# Altium PCB VIGIA_2_1.PcbDoc
Units mm, origin at the board's own origin, x right, y up, seen from the top; angles counter-clockwise.
Board outline 27 x 40 mm, 2 copper layers (Top Layer, Bottom Layer); 26 components, 24 nets, 76 pads, 8 vias.
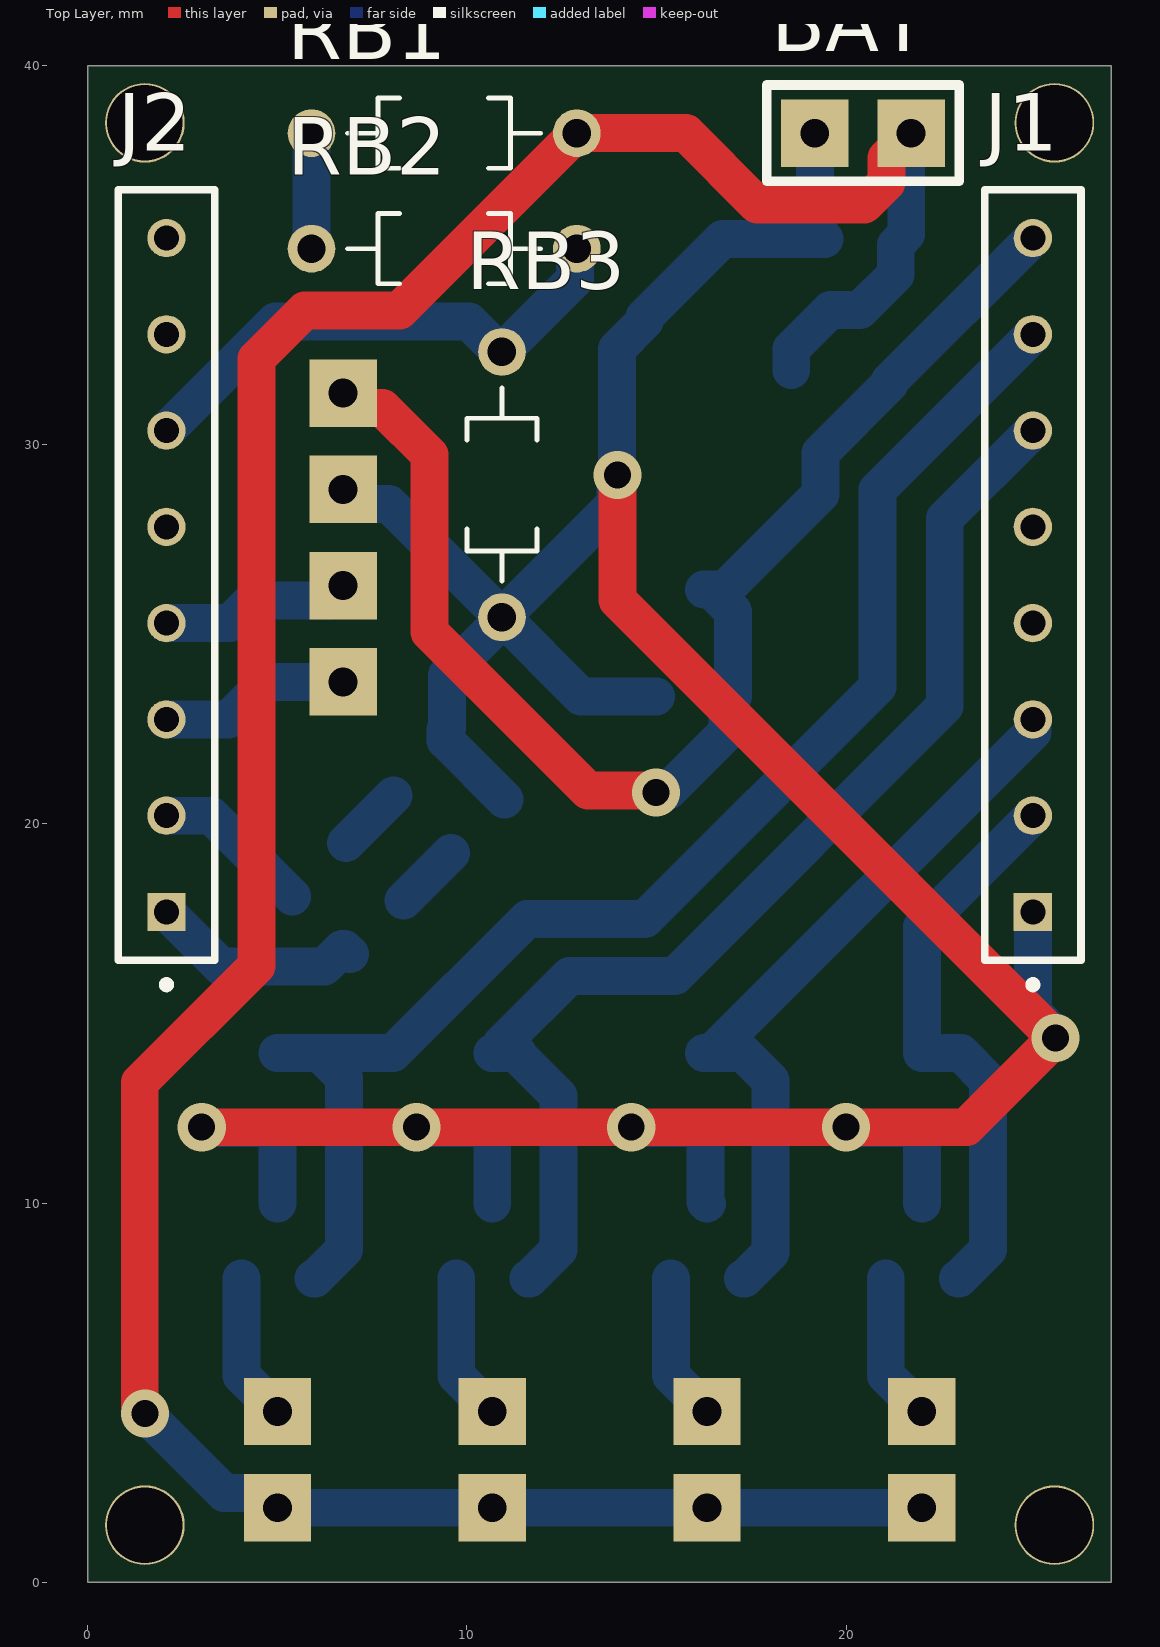
[diagram p0: Top Layer view]
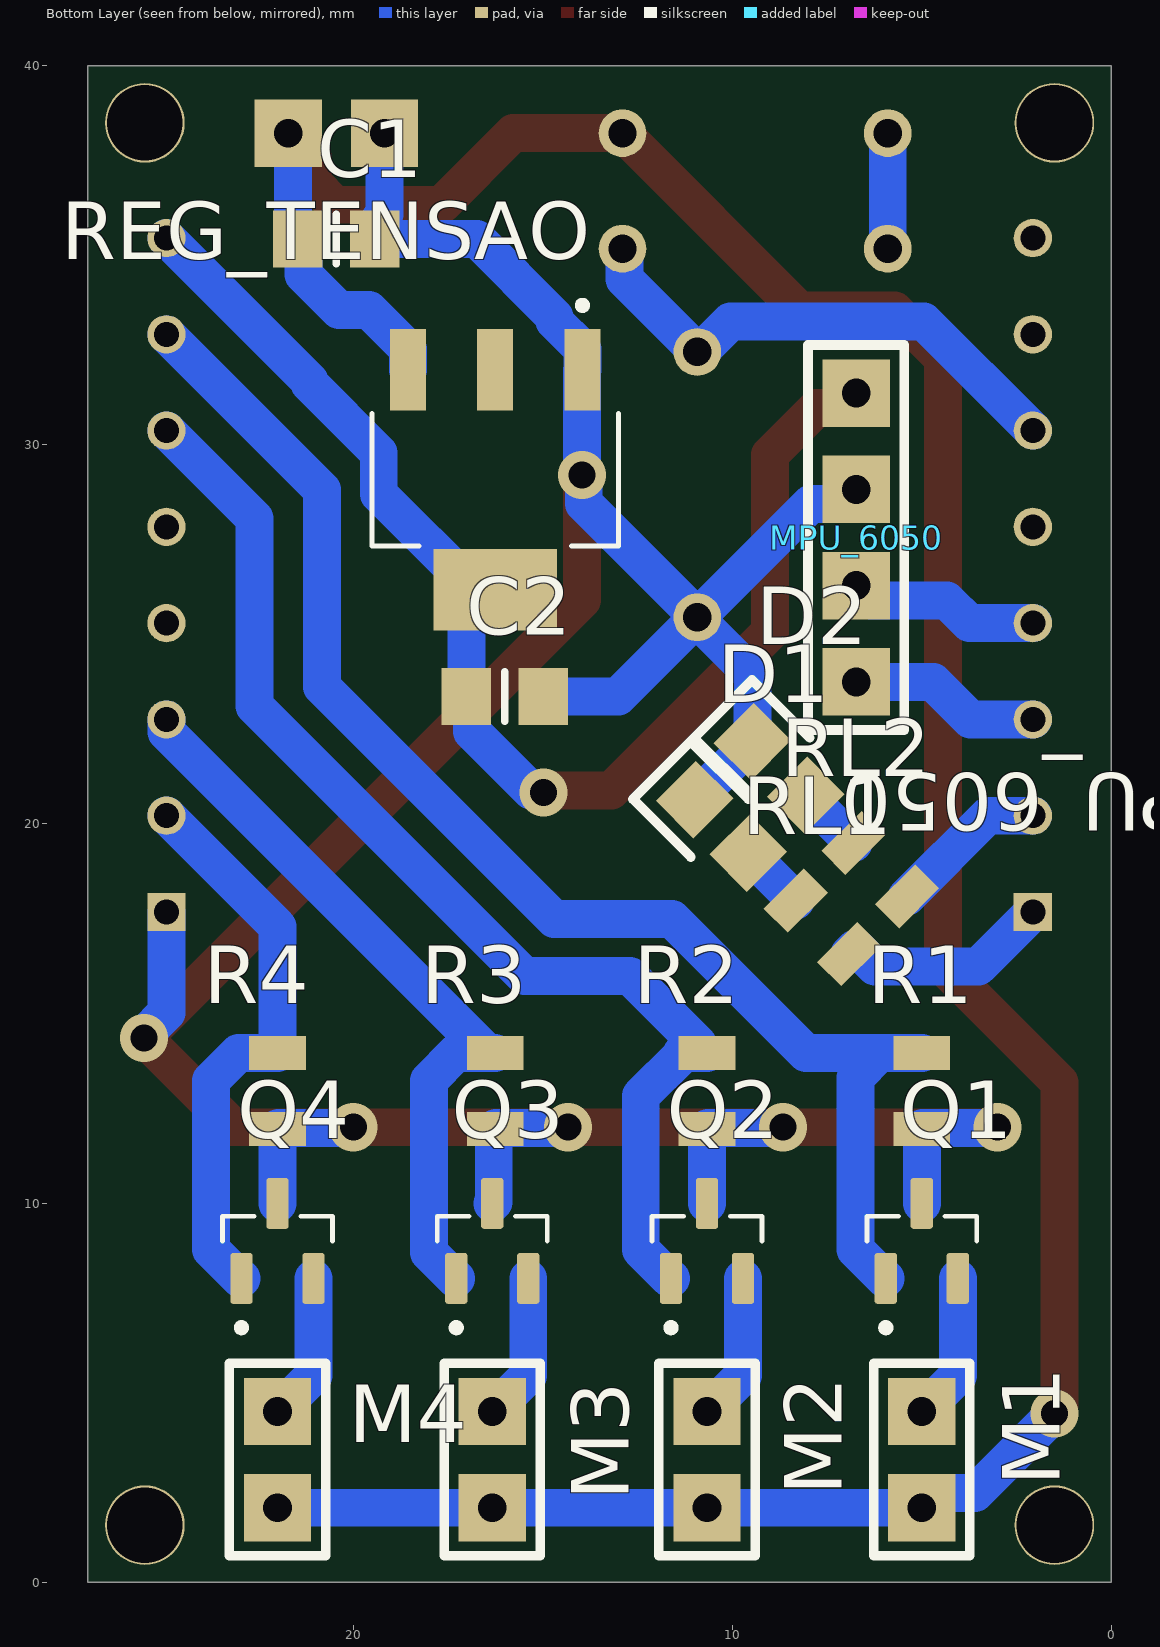
[diagram p1: Bottom Layer view, seen from below]

## Layer stack, top to bottom
Top Solder: solder mask 0.0102, Solder Resist, Dk 3.5
Top Layer: signal copper 0.0356
Dielectric 1: dielectric 0.32, FR-4, Dk 4.8
Bottom Layer: signal copper 0.0356
Bottom Solder: solder mask 0.0102, Solder Resist, Dk 3.5

## Board outline
0,0 0,40 27,40 27,0

## Design rules (kind name [scope] priority, off if disabled: settings)
Clearance [All] p1: gap=0.5 ignorepadtopadclearanceinfootprint=FALSE
PolygonConnect [All] p1: connectstyle=Relief reliefconductorwidth=0.254 reliefentries=4 polygonreliefangle="90 Angle" airgapwidth=0.254
RoutingVias [All] p1: holewidth=0.711 width=1.27 viastyle="Through Hole" minholewidth=0.711 minwidth=1.27 maxholewidth=0.711 maxwidth=1.27
SolderMaskExpansion [All] p1: expansion=0.102 istentingtop=FALSE
SupplyNets "Schematic Supply Nets" [InNet('GND')] p1: voltage=0.000
Width [All] p1: maxlimit=1 minlimit=1 preferedwidth=1 minimp=50.000000 maximp=50.000000 favimp=50.000000
30 further rules are at their usual default settings.

## Components (designator, comment, footprint, x,y, rotation, side; value= is the part's Value field where it differs from the comment)
BAT "CONECTOR_2PIN" CON2 21.717,38.227 r180 top
C1 "CAP" "CAP 0805" 20.447,35.433 r0 bottom
C2 "CAP" "CAP 0805" 16.002,23.368 r0 bottom
D1 "DBGLED1" "LED 0805" 10.287,19.939 r45 bottom
D2 "DBGLED2" "LED 0805" 8.763,21.463 r45 bottom
J1 "GESP1" SAMTEC_SS-108-T-2 24.93,17.68 r270 top
J2 "GESP2" SAMTEC_SS-108-T-2 2.07,17.68 r270 top
M1 "CONECTOR_2PIN" CON2 5,4.5 r270 bottom
M2 "CONECTOR_2PIN" CON2 10.667,4.5 r270 bottom
M3 "CONECTOR_2PIN" CON2 16.333,4.5 r270 bottom
M4 "CONECTOR_2PIN" CON2 22,4.5 r270 bottom
MPU_6050 "CONECTOR_4PIN" CON4 6.731,31.369 r270 bottom
Q1 "BSS84_RFG" SOT95P240X115-3N 5,9 r90 bottom
Q2 "BSS84_RFG" SOT95P240X115-3N 10.667,9 r90 bottom
Q3 "BSS84_RFG" SOT95P240X115-3N 16.333,9 r90 bottom
Q4 "BSS84_RFG" SOT95P240X115-3N 22,9 r90 bottom
R1 "RESISTOR" "RES 0805" 5,12.954 r90 bottom value=10k
R2 "RESISTOR" "RES 0805" 10.667,12.954 r90 bottom value=10k
R3 "RESISTOR" "RES 0805" 16.256,12.954 r90 bottom value=10k
R4 "RESISTOR" "RES 0805" 22,12.954 r90 bottom value=10k
RB1 "820K" RESAD700W45L350D185 9.398,38.227 r0 top
RB2 "82 Ohms" RESAD700W45L350D185 9.398,35.179 r0 top
RB3 "3M3" RESAD700W45L350D185 10.922,28.956 r90 top
REG_TENSAO "TLV1117LV33DCYR" VREG_TLV1117LV33DCYR 16.256,29.083 r270 bottom
RL1 "RESISTOR" "RES 0805" 7.62,17.272 r45 bottom value=100
RL2 "RESISTOR" "RES 0805" 6.096,18.796 r45 bottom value=100

## Footprints (in the part's own frame and the unit in brackets; to place one, negate y for a bottom-side part, rotate by r counter-clockwise, add the part's x,y. Pads: shape width x height; smd on the part's side, far side on the other; paste and mask are expansions set on the pad)
"CAP 0805" [mm] "0805"
  rect 1.3x1.5 smd: 1(-1.016,0) 2(1.016,0)
  silkscreen extent 0,-0.65 0,0.65, body extent -1.03,-0.61 0.97,0.59, height 0.88
CON2 [mil]
  rect 70x70 hole 30: 1(0,0) 2(100,0)
  silkscreen extent -50,-50 150,50, body extent -42,-47 143,45, height 519
CON4 [mil]
  rect 70x70 hole 30: 1(0,0) 2(100,0) 3(200,0) 4(300,0)
  silkscreen extent -50,-50 350,50, body extent -50,-47 343,45, height 519
"LED 0805" [mm] "0805"
  rect 1.4x1.5 smd: 1(-1,0) 2(1,0)
  silkscreen extent 0,-1.14 2.16,1.14, body extent -1.03,-0.4 1.03,0.51, height 0.85
"RES 0805" [mm] "0805 (1/8W)"
  rect 0.9x1.5 smd: 1(-1,0) 2(1,0)
  body extent -1.02,-0.63 0.95,0.6, height 0.48
RESAD700W45L350D185 [mm]
  round 1.258 hole 0.75: 1(-3.5,0) 2(3.5,0)
  silkscreen extent -2.55,-0.92 2.55,0.92, body extent -3.72,-0.92 3.72,0.92, height 1.84
SAMTEC_SS-108-T-2 [mm]
  rect 1.01x1.01 hole 0.66: 01(0,0)
  round 1.01 hole 0.66: 02(-2.54,0) 03(-5.08,0) 04(-7.62,0) 05(-10.16,0) 06(-12.7,0) 07(-15.24,0) 08(-17.78,0)
  silkscreen extent -19.05,-1.27 2.02,1.27
SOT95P240X115-3N [mm]
  rrect25% 1.34x0.59 smd: 1(-0.99,0.95) 2(-0.99,-0.95) 3(0.99,0)
  silkscreen extent -2.39,-1.45 0.65,1.45, body extent -1.2,-1.45 1.2,1.45, height 1.15
VREG_TLV1117LV33DCYR [mm]
  rect 2.15x0.95 smd: 1(-2.9,2.3) 2(-2.9,0) 3(-2.9,-2.3)
  rect 2.15x3.25 smd: 4(2.9,0)
  silkscreen extent -4.7,-3.25 1.75,3.25, body extent -3.5,-3.25 3.5,3.25, height 1.8

## Part data
C1 C2: library part "CAP. CERÂMICO", "Capacitor", Criado em=26/06/2012, Criador por="Luigi Eduardo", Pertence a=Trincabotz, Valor=10nF
D1 D2: library part LED
J1 J2: library part SS-108-T-2, "SS Series .100 Single Row Screw Machine Socket Strip", Package=None, Availability=Bad, MF=Samtec, MP=SS-108-T-2, Price=None, SnapEDA_Link=https://www.snapeda.com/parts/SS-108-T-2/Samtec/view-part/3323909/?ref=snap
  J2: Check_prices=SLA
Q1 Q2 Q3 Q4: "-60V, -0.15A, Single P-Channel Small-signal MOSFETs", Package="SOT-23-3 Taiwan Semiconductor", Check_prices=https://www.snapeda.com/parts/BSS84%20RFG/Taiwan+Semiconductor/view-part/?ref=eda, MF="Taiwan Semiconductor", MP="BSS84 RFG", SnapEDA_Link=https://www.snapeda.com/parts/BSS84%20RFG/Taiwan+Semiconductor/view-part/?ref=snap
R1 R2 R3 R4 RL1 RL2: "Resistor"
RB1 RB2 RB3: library part 3-1623927-1, "1 MOhms Â±5% 0.25W, 1/4W Through Hole Resistor Axial - Carbon Film", Package=None, Check_prices=https://www.snapeda.com/parts/3-1623927-1/TE+Connectivity/view-part/?ref=eda, MF="TE Connectivity", MP=3-1623927-1, SnapEDA_Link=https://www.snapeda.com/parts/3-1623927-1/TE+Connectivity/view-part/?ref=snap
REG_TENSAO: "1-A, low-dropout voltage regulator", Package="SOT-223-4 Texas Instruments", Check_prices=https://www.snapeda.com/parts/TLV1117LV33DCYR/Texas+Instruments/view-part/?ref=eda, MF="Texas Instruments", MP=TLV1117LV33DCYR, SnapEDA_Link=https://www.snapeda.com/parts/TLV1117LV33DCYR/Texas+Instruments/view-part/?ref=snap

## Free pads (board coordinates)
  round 2.1 hole 2: 7(25.5,1.5) 8(1.5,1.5) 9(25.5,38.5) 10(1.5,38.5)

## Via types
v1: diameter 1.27, hole 0.711, Top Layer to Bottom Layer, 8 vias

## Nets (pads, with @x,y where several pads share a name; then routed paths per layer and width w, separated by ;. In a path a pad name is that pad's centre, name@x,y a point inside that pad or via, vN(x,y) a via of type N, cw(c..) or ccw(c..) an arc to the next point about the centre after c; other vN are vias at no path point)
3.3V: C2.2 J1.08 MPU_6050.1 REG_TENSAO.4 | length 35.3
  Top Layer w1: MPU_6050.1 7.12,30.98 7.772,30.98 9.01,29.742 9.01,25.065 13.195,20.88 14.934,20.88 v1(14.986,20.828)
  Bottom Layer w1: v1(14.986,20.828) 15.038,20.88 15.312,20.88 16.868,22.436 16.868,23.218 C2.2 17.018,25.608 16.443,26.183 REG_TENSAO.4 16.806,26.183 19.328,28.705 19.328,29.791 21.155,31.617 21.155,31.685 J1.08
CTRLM1: J1.07 Q1.1 R1.2 | length 37.4
  Bottom Layer w1: R1.2 6.112,13.954 ; Q1.1 5.985,8.01 6.75,8.775 6.75,13.316 6.112,13.954 ; J1.07 20.828,28.818 20.828,23.622 14.697,17.491 11.59,17.491 8.052,13.954 6.112,13.954
CTRLM2: J1.06 Q2.1 R2.2 | length 31.2
  Bottom Layer w1: R2.2 R2.2@11.331,13.954 ; R2.2@10.917,14.004 10.917,14.204 12.704,15.991 15.483,15.991 22.606,23.114 22.606,28.056 J1.06 ; R2.2@11.331,13.904 12.417,12.818 12.417,8.775 11.652,8.01 Q2.1
CTRLM3: J1.03 Q3.1 R3.2 | length 20.1
  Bottom Layer w1: Q3.1 17.318,8.01 18.006,8.698 18.006,13.236 17.288,13.954 R3.2 16.456,13.954 24.928,22.426 24.928,22.758 J1.03
CTRLM4: J1.02 Q4.1 R4.2 | length 15.1
  Bottom Layer w1: Q4.1 22.985,8.01 23.75,8.775 23.75,13.235 23.031,13.954 R4.2 22,17.29 J1.02
GND: BAT.2 C1.1 C2.1 D1.2 D2.2 J1.01 MPU_6050.2 Q1.3 Q2.3 Q3.3 Q4.3 R1.1 R2.1 R3.1 R4.1 RB3.1 REG_TENSAO.1 | length 97.1
  Top Layer w1: v1(3,12) v1(8.667,12) v1(14.333,12) v1(20,12) 23.176,12 v1(25.527,14.351) 13.97,25.908 v1(13.97,29.21)
  Bottom Layer w1: v1(3,12) 3.023,11.977 4.977,11.977 R1.1 Q1.3 ; MPU_6050.2 7.12,28.44 7.938,28.44 RB3.1 ; v1(8.667,12) 8.69,11.977 10.644,11.977 R2.1 Q2.3 ; D1.2 D2.2 9.435,22.205 9.435,22.488 9.47,22.524 9.47,23.934 10.922,25.386 RB3.1 ; v1(14.333,12) 14.356,11.977 16.233,11.977 R3.1 16.295,11.915 16.295,10.029 Q3.3 ; C2.1 13.01,23.368 RB3.1 ; BAT.2 19.177,36.087 19.281,35.983 19.281,35.583 C1.1 ; C1.1@19.304,35.456 19.281,35.433 16.742,35.433 14.688,33.379 14.688,33.265 13.956,32.533 REG_TENSAO.1 13.963,31.976 13.963,29.217 v1(13.97,29.21) 13.918,29.158 13.918,28.452 RB3.1 ; v1(20,12) 20.023,11.977 21.977,11.977 R4.1 Q4.3 ; J1.01 24.93,15.021 25.527,14.424 v1(25.527,14.351)
LEDDBG1: J2.01 RL1.1 | length 5.7
  Bottom Layer w1: J2.01 3.51,16.24 6.235,16.24 6.701,16.706 6.771,16.706 RL1.1
LEDDBG2: J2.02 RL2.1 | length 4.2
  Bottom Layer w1: J2.02 2.072,20.218 3.26,20.218 RL2.1
MBAT: J2.06 RB2.2 RB3.2 | length 13.9
  Bottom Layer w1: J2.06 4.948,33.258 10.05,33.258 10.852,32.456 RB3.2 12.849,34.383 12.849,35.13 RB2.2
NetD1_1: D1.1 RL1.2 | length 1.8
  Bottom Layer w1: RL1.2 D1.1
NetD2_1: D2.1 RL2.2 | length 1.8
  Bottom Layer w1: RL2.2 D2.1
NetJ1_04: J1.04
NetJ1_05: J1.05
NetJ2_05: J2.05
NetJ2_07: J2.07
NetJ2_08: J2.08
NetM1_1: M1.1 Q1.2 | length 3.9
  Bottom Layer w1: Q1.2 4.05,5.45 M1.1
NetM2_1: M2.1 Q2.2 | length 3.9
  Bottom Layer w1: Q2.2 9.717,5.45 M2.1
NetM3_1: M3.1 Q3.2 | length 3.9
  Bottom Layer w1: Q3.2 15.383,5.45 M3.1
NetM4_1: M4.1 Q4.2 | length 3.9
  Bottom Layer w1: Q4.2 21.05,5.45 M4.1
NetRB1_1: RB1.1 RB2.1 | length 3
  Bottom Layer w1: RB2.1 RB1.1
SCL: J2.04 MPU_6050.3 | length 5.1
  Bottom Layer w1: J2.04 2.072,25.302 3.744,25.302 4.342,25.9 6.342,25.9 MPU_6050.3
SDA: J2.03 MPU_6050.4 | length 5.1
  Bottom Layer w1: J2.03 3.71,22.76 4.699,23.749 MPU_6050.4
VBAT: BAT.1 C1.2 M1.2 M2.2 M3.2 M4.2 RB1.2 REG_TENSAO.3 | length 80.4
  Top Layer w1: v1(1.5,4.445) 1.5,4.518 1.365,4.653 1.365,13.176 4.445,16.256 4.445,32.275 5.72,33.55 8.221,33.55 RB1.2 15.78,38.227 17.669,36.338 20.48,36.338 21.066,36.924 21.066,37.576 BAT.1
  Bottom Layer w1: v1(1.5,4.445) 3.596,2.349 4.611,2.349 M1.2 M2.2 M3.2 M4.2 ; REG_TENSAO.3 18.556,32.533 19.585,33.562 20.374,33.562 21.313,34.501 21.313,35.283 C1.2 21.59,35.56 21.59,38.1 BAT.1
pads on no net: REG_TENSAO.2